# Altium PCB MB1136.PcbDoc (part 1 of 2)
Units mm, origin at the board's own origin, x right, y up, seen from the top; angles counter-clockwise.
Board outline 70 x 83 mm, 2 copper layers (Top Layer, Bottom Layer), stack 1.571 mm thick; 176 components, 154 nets, 599 pads, 425 vias.
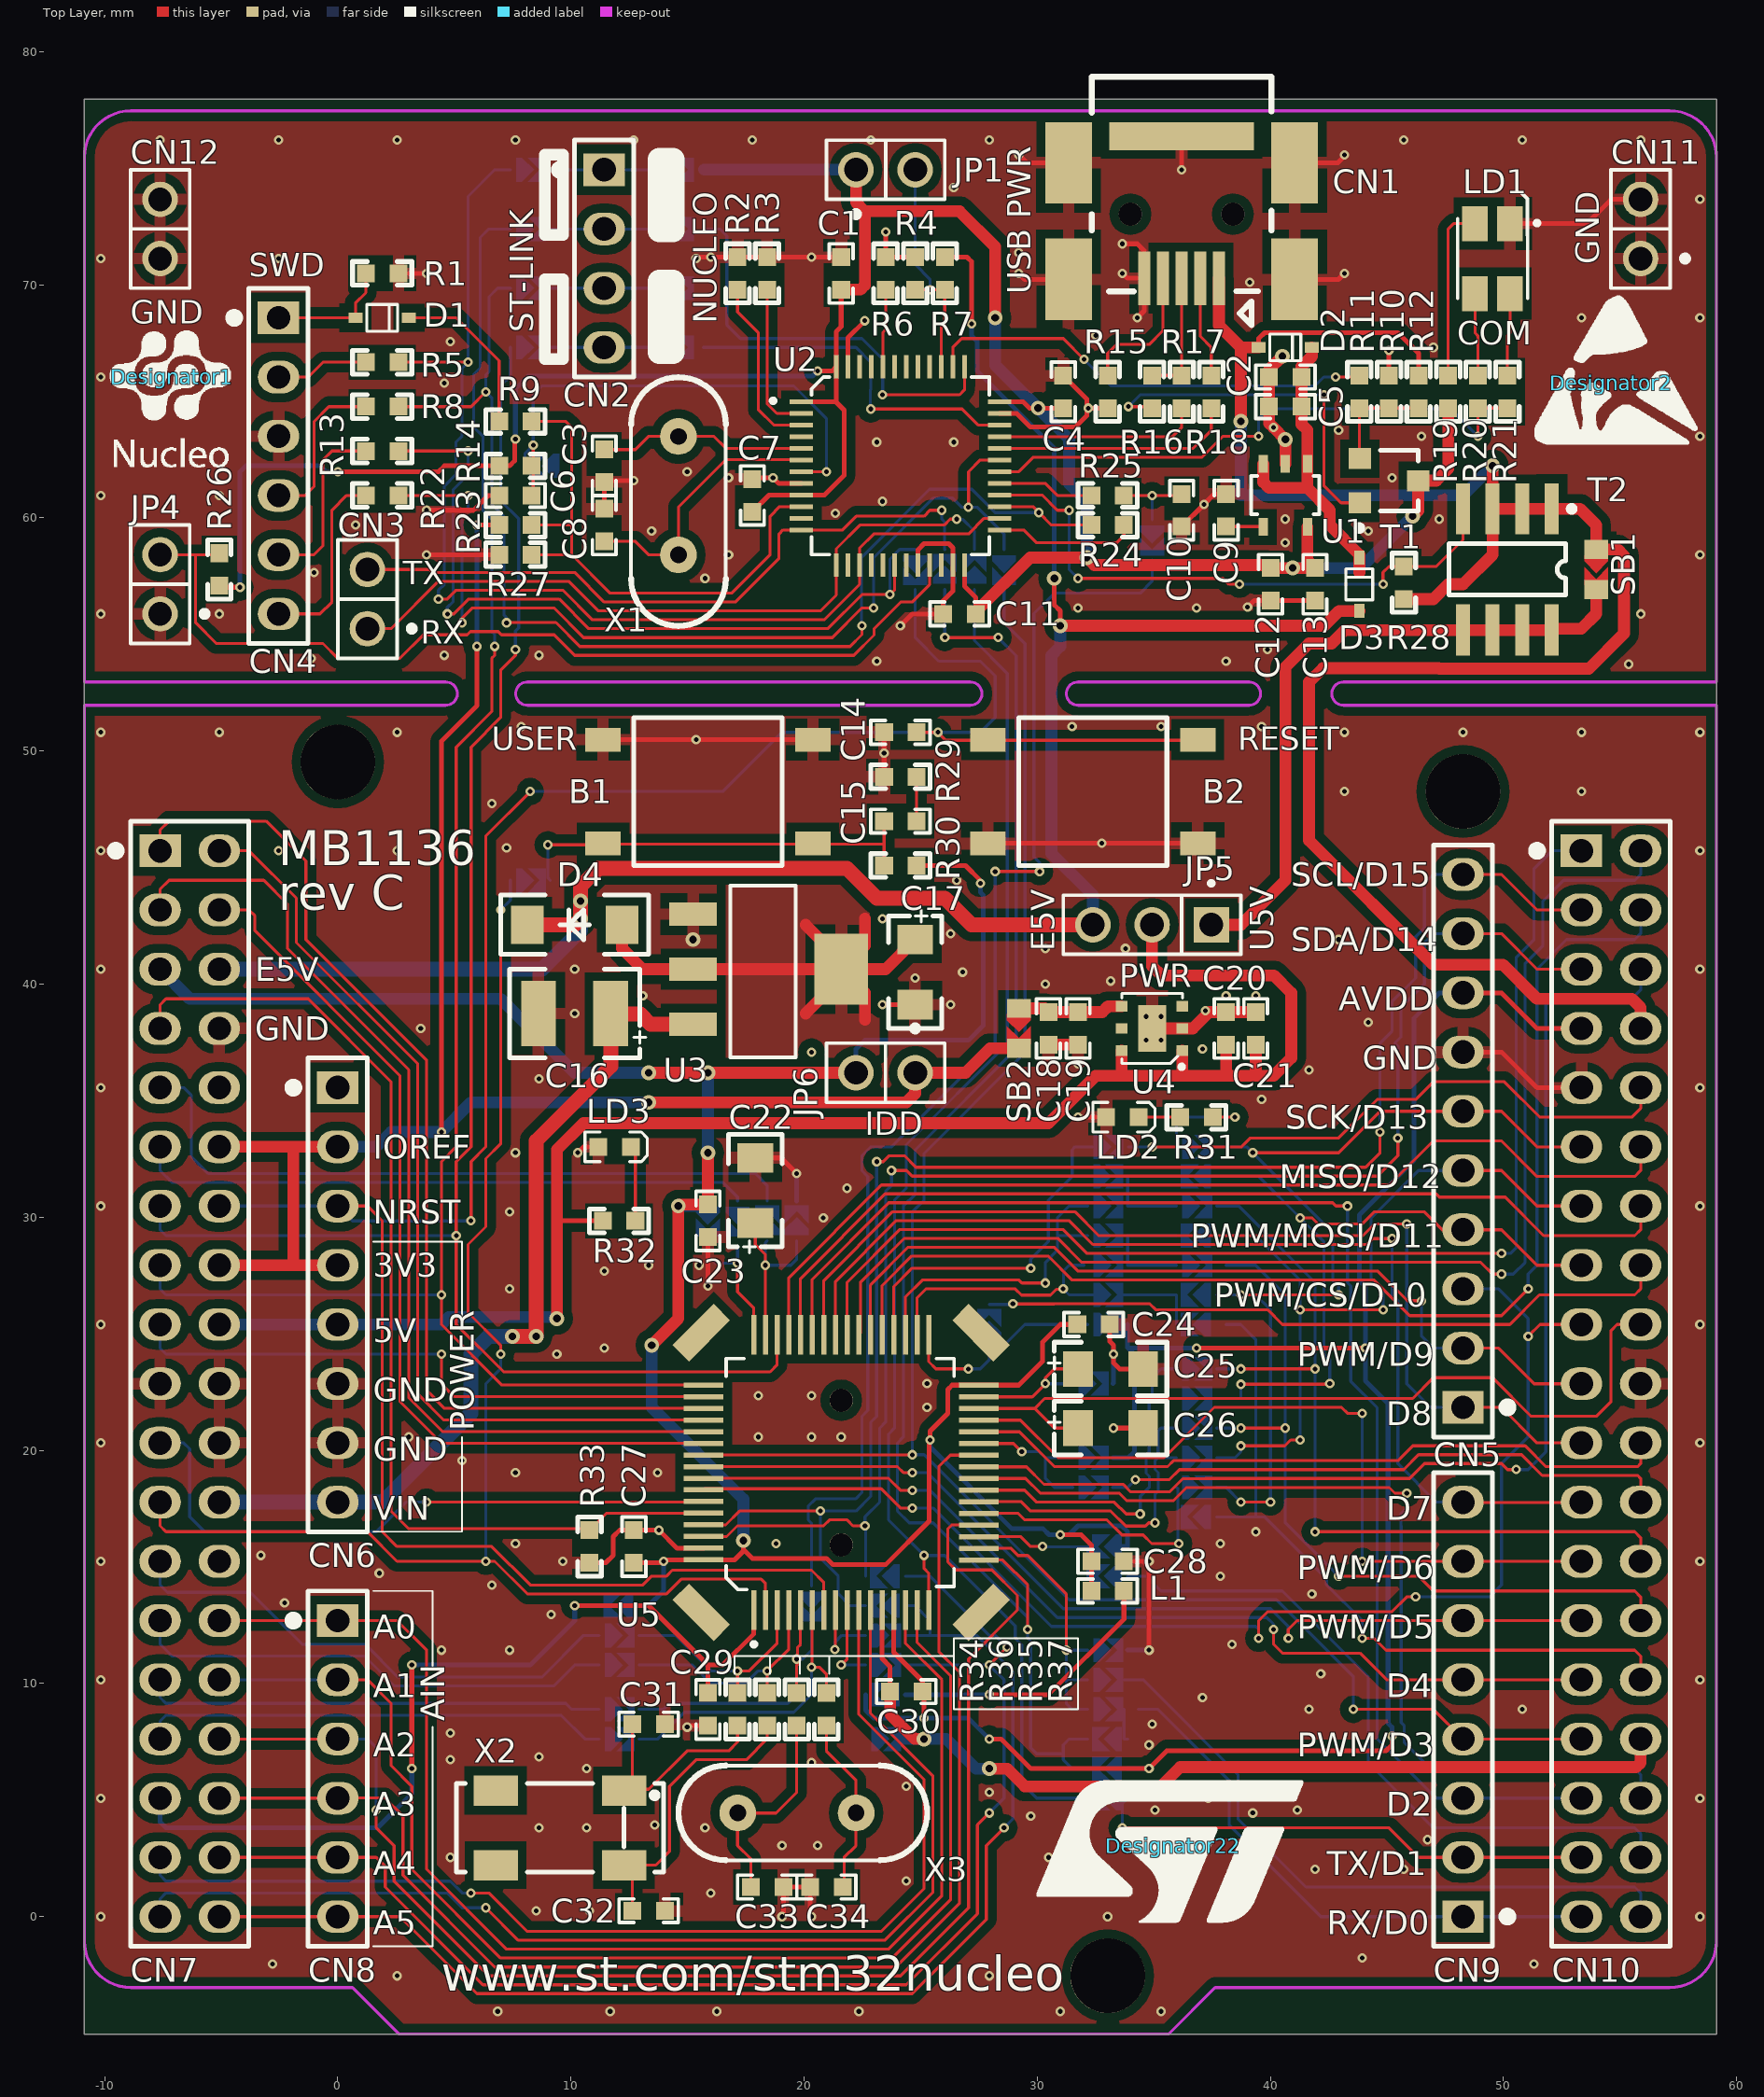
[diagram p0: Top Layer view]
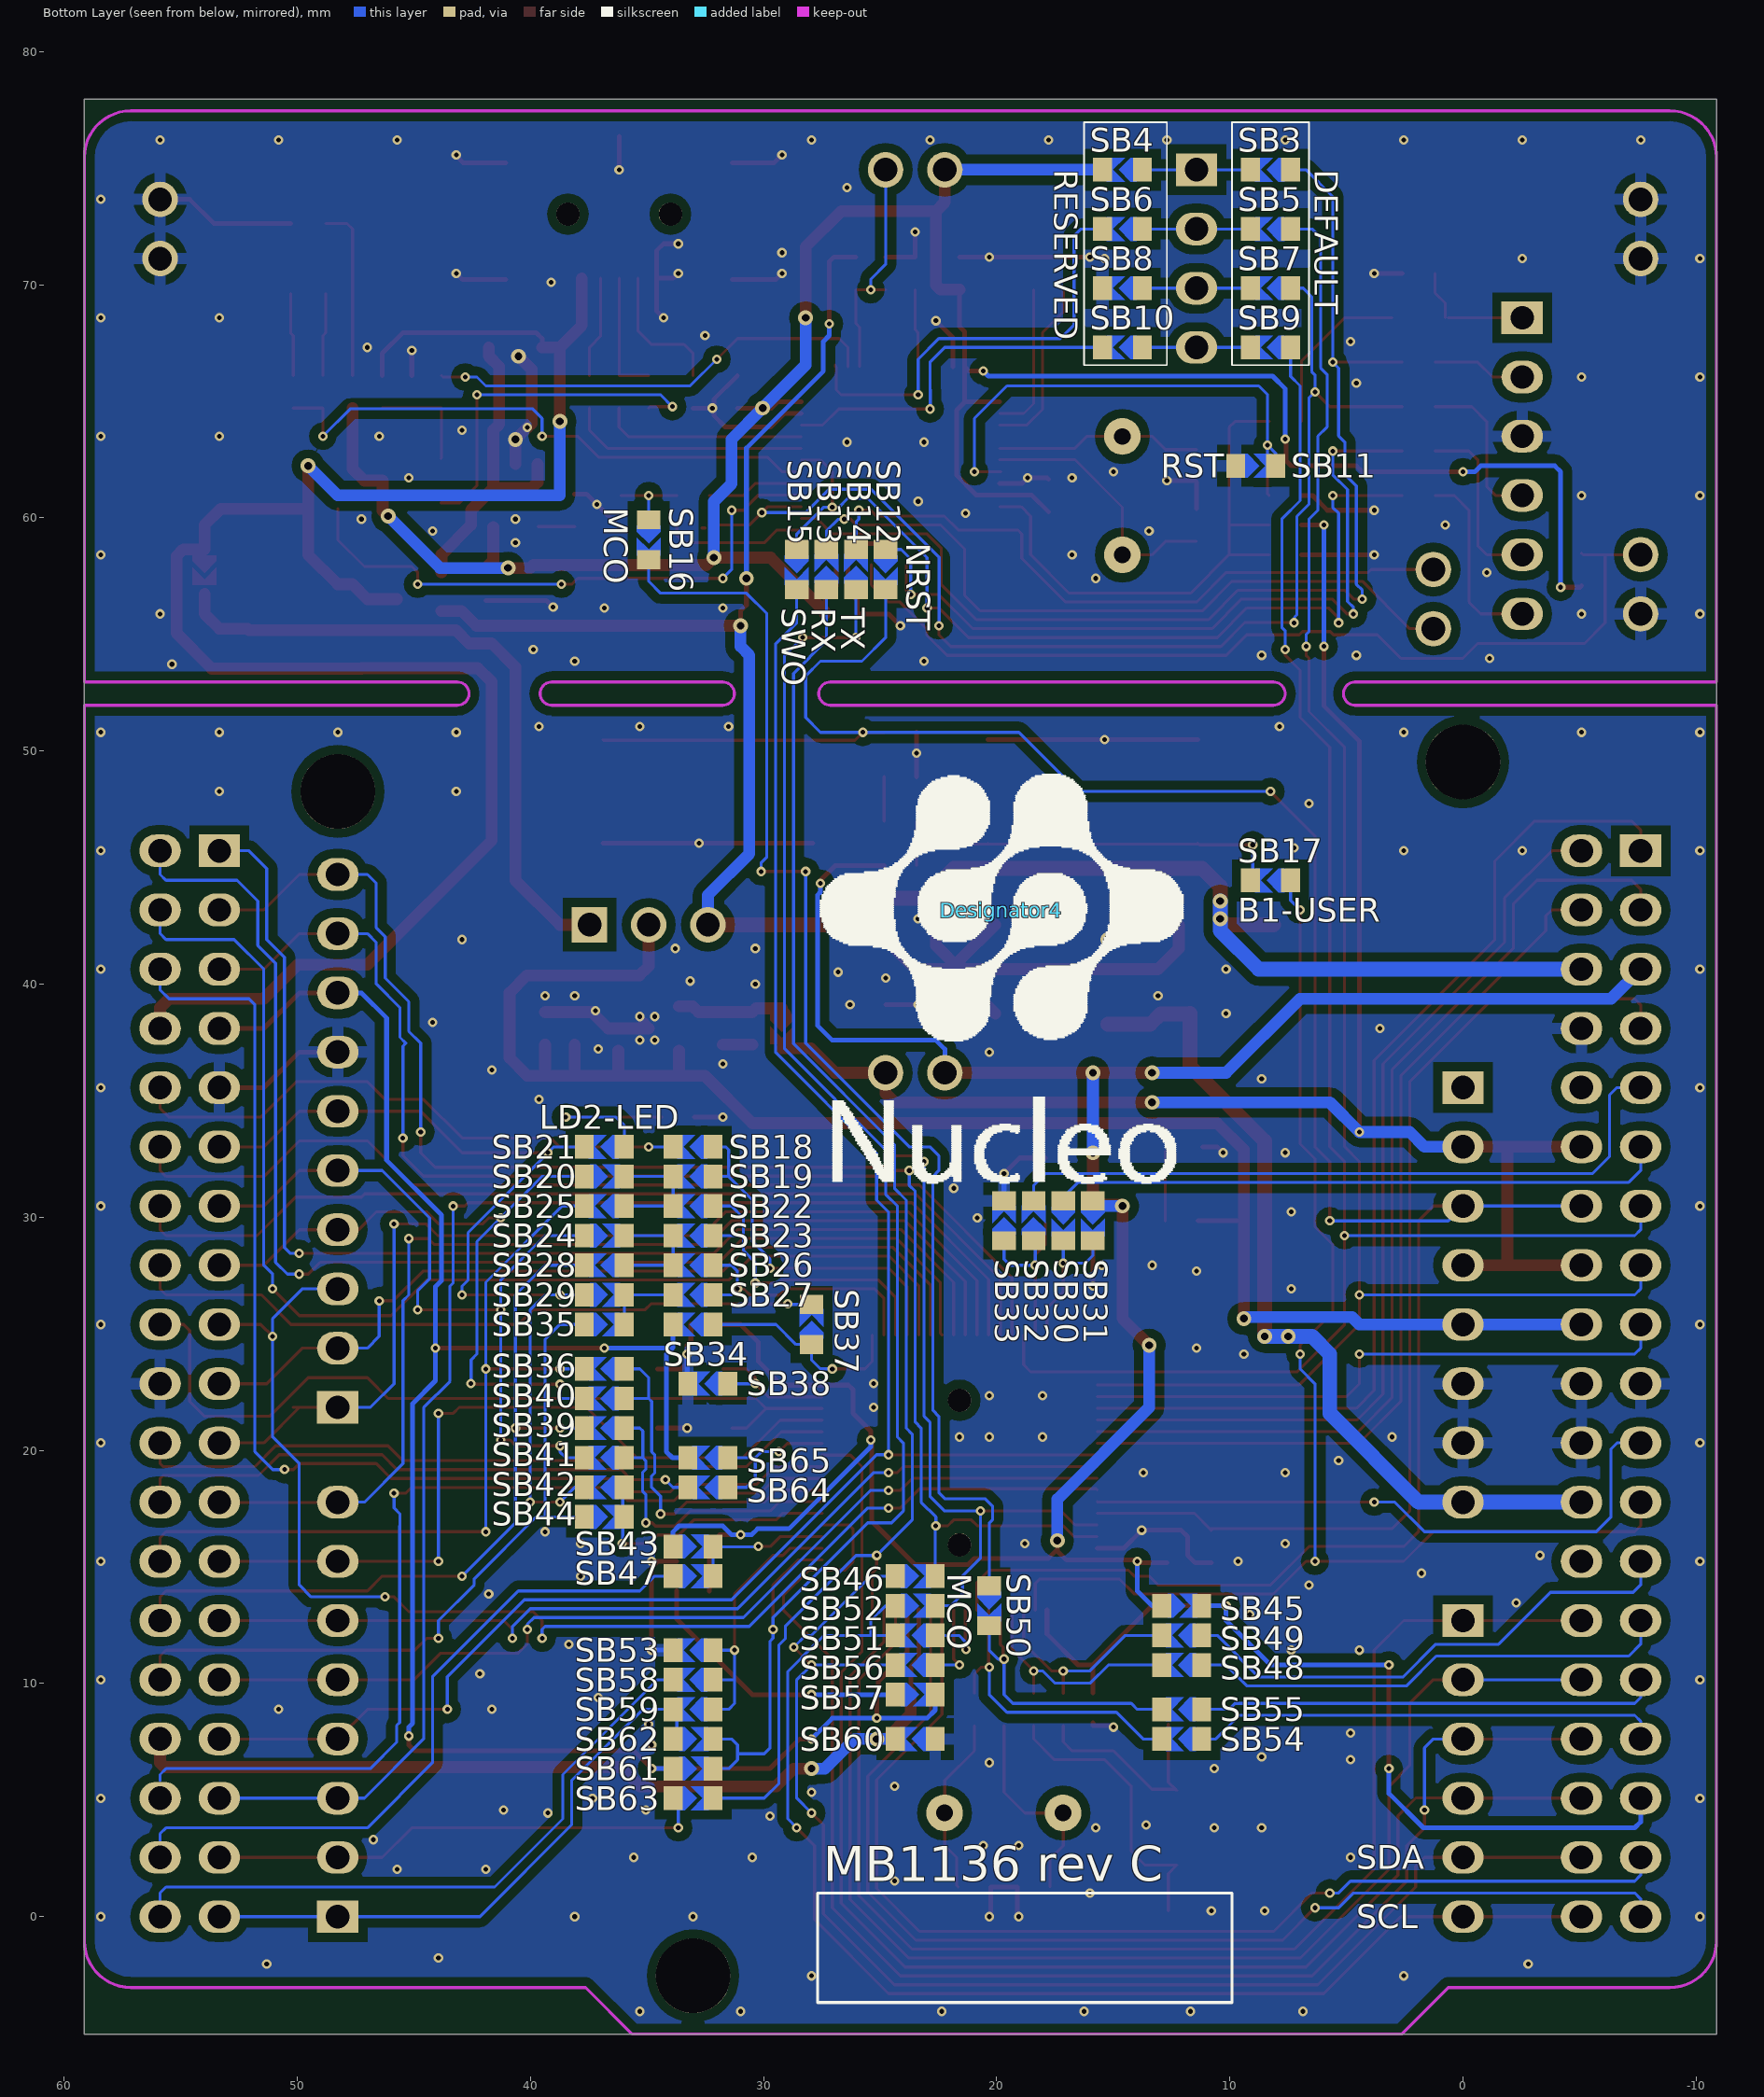
[diagram p1: Bottom Layer view, seen from below]

## Layer stack, top to bottom
Top Solder: solder mask 0.0102, Solder Resist, Dk 3.5
Top Layer: signal copper 0.0356
Dielectric1: core 1.5, FR-4, Dk 4.8
Bottom Layer: signal copper 0.0356
Bottom Solder: solder mask 0.0102, Solder Resist, Dk 3.5

## Board outline
-10.87,-5.04 -10.87,77.96 59.13,77.96 59.13,-5.04 -10.87,-5.04

## Design rules (kind name [scope] priority, off if disabled: settings)
Clearance Clearance_1 [(InPoly)] p1: gap=0.381 ignorepadtopadclearanceinfootprint=FALSE except(0: Arc-Hole Track-Hole SMDPad-Hole THPad-Hole Via-Hole Fill-Hole Poly-Hole Region-Hole Text-Hole)
Clearance Clearance_2 [(HasFootprint('SB_DIP')) or (HasFootprint('JP2_SMD')) or InNet('PC13')] p2: gap=0.127 ignorepadtopadclearanceinfootprint=FALSE except(0: Arc-Hole Track-Hole SMDPad-Hole THPad-Hole Via-Hole Fill-Hole Poly-Hole Region-Hole Text-Hole)
Clearance [All] p3: gap=0.254 ignorepadtopadclearanceinfootprint=FALSE except(0: Arc-Hole Track-Hole SMDPad-Hole THPad-Hole Via-Hole Fill-Hole Poly-Hole Region-Hole Text-Hole)
FabricationTestPointUsage TestPointUsage [All] p1: valid=0 allowmultiple=FALSE
FabricationTestpoint Testpoint [(IsPad And (OnTopLayer Or OnBottomLayer))] p1: side=3 testpointundercomponent=TRUE minsize=1.016 maxsize=2.54 preferedsize=1.524 minholesize=0 maxholesize=1.016 preferedholesize=0.813 testpointgrid=0.025 allowsidetop=TRUE allowsidebottom=TRUE usegrid=TRUE gridtolerance=0
HoleSize [All] p1: absolutevalues=TRUE maxlimit=3.81 minlimit=0.025 maxpercent=80.000 minpercent=20.000
PolygonConnect PolygonConnect_1 [IsVia] p1: connectstyle=Direct reliefconductorwidth=0.508 reliefentries=4 polygonreliefangle="90 Angle" airgapwidth=0.254
PolygonConnect [All] p2: connectstyle=Relief reliefconductorwidth=0.508 reliefentries=4 polygonreliefangle="90 Angle" airgapwidth=0.254
RoutingLayers [All] p1: top layer_v5=FALSE bottom layer_v5=FALSE
RoutingVias [All] p1: holewidth=0.33 width=0.635 viastyle="Through Hole" minholewidth=0.203 minwidth=0.406 maxholewidth=0.711 maxwidth=1.27
SilkToSolderMaskClearance SilkscreenOverComponentPads [IsPad] p1: minsilkscreentomaskgap=0.254 clearancetoexposedcopper=TRUE
SolderMaskExpansion [All] p1: expansion=0.102 istentingtop=FALSE
Width Width_1 [InNet('VDD_MCU')] p1: maxlimit=2.54 minlimit=0.152 preferedwidth=0.305
Width [All] p2: maxlimit=2.54 minlimit=0.127 preferedwidth=0.127 minimp=50.000000 maximp=50.000000 favimp=50.000000
25 further rules are at their usual default settings.

## Classes and differential pairs
component class MB1136: C16 C17 C18 C19 C20 C21 D4 JP5 JP6 LD3 R28 R32 SB1 SB2 T2 U3 U4
component class U_ST_LINK_V2-1: C1 C2 C3 C4 C5 C6 C7 C8 C9 C10 C11 C12 C13 CN1 CN2 CN3 CN4 CN11 CN12 D1 D2 D3 JP1 JP4 LD1 R1 R2 R3 R4 R5 R6 R7 R8 R9 R10 R11 R12 R13 R14 R15 R16 R17 R18 R19 R20 R21 R22 R23 R24 R25 R26 R27 SB3 SB4 SB5 SB6 SB7 SB8 SB9 SB10 SB11 SB12 SB13 SB14 SB15 SB16 T1 U1 U2 X1
net class PA[0..15]: PA0 PA1 PA2 PA3 PA4 PA5 PA6 PA7 PA8 PA9 PA10 PA11 PA12 PA13 PA14 PA15
net class PB[0..15]: PB0 PB1 PB2 PB3 PB4 PB5 PB6 PB7 PB8 PB9 PB10 PB11 PB12 PB13 PB14 PB15
net class PC[0..15]: PC0 PC1 PC2 PC3 PC4 PC5 PC6 PC7 PC8 PC9 PC10 PC11 PC12 PC13 PC14 PC15
net class PF[0..7]: PF0 PF1 PF4 PF5 PF6 PF7
component class U_MCU_64: B1 B2 C14 C15 C22 C23 C24 C25 C26 C27 C28 C29 C30 C31 C32 C33 C34 L1 R29 R30 R33 R34 R35 R36 R37 SB17 SB18 SB19 SB22 SB23 SB26 SB27 SB30 SB31 SB32 SB33 SB34 SB37 SB38 SB43 SB45 SB47 SB50 SB53 SB57 SB58 SB59 SB60 SB61 SB62 SB63 SB64 SB65 U5 X2 X3
component class U_Connectors: CN5 CN6 CN7 CN8 CN9 CN10 LD2 R31 SB20 SB21 SB24 SB25 SB28 SB29 SB35 SB36 SB39 SB40 SB41 SB42 SB44 SB46 SB48 SB49 SB51 SB52 SB54 SB55 SB56

## Components (designator, comment, footprint, x,y, rotation, side; value= is the part's Value field where it differs from the comment)
B1 "USER (Blue)" PB10 15.875,48.26 r180 top
B2 "TD-0341 [RESET/Black]" PB10 32.385,48.26 r0 top
C1 "100nF" 0603C 21.59,70.485 r90 top (schematic designator C7)
C2 "1uF_X5R_0603" 0603C 40.64,66.04 r180 top (schematic designator C9)
C3 "20pF" 0603C 11.43,62.23 r90 top (schematic designator C2)
C4 "100nF" 0603C 31.115,65.405 r90 top (schematic designator C6)
C5 "100nF" 0603C 40.64,64.77 r180 top (schematic designator C11)
C6 "100nF" 0603C 7.62,60.96 r180 top (schematic designator C4)
C7 "100nF" 0603C 17.78,60.96 r90 top (schematic designator C8)
C8 "20pF" 0603C 11.43,59.69 r270 top (schematic designator C1)
C9 "10nF_X7R_0603" 0603C 38.1,60.325 r90 top (schematic designator C12)
C10 "20pF" 0603C 36.195,60.325 r90 top (schematic designator C3)
C11 "100nF" 0603C 26.67,55.88 r180 top (schematic designator C5)
C12 "100nF" 0603C 40.005,57.15 r270 top (schematic designator C13)
C13 "1uF_X5R_0603" 0603C 41.91,57.15 r90 top (schematic designator C10)
C14 "100nF" 0603C 24.13,50.8 r180 top (schematic designator C20)
C15 "100nF" 0603C 24.13,46.99 r0 top (schematic designator C16)
C16 "10uF(25V)" TAN-B 10.16,38.735 r90 top (schematic designator C28)
C17 "10uF" TAN-A 24.765,41.91 r90 top (schematic designator C35)
C18 "1uF_X5R_0603" 0603C 30.48,38.1 r90 top (schematic designator C29)
C19 "100nF" 0603C 31.75,38.1 r270 top (schematic designator C32)
C20 "100nF" 0603C 38.1,38.1 r90 top (schematic designator C30)
C21 "1uF_X5R_0603" 0603C 39.37,38.1 r270 top (schematic designator C17)
C22 "2.2uF" TAN-A 17.907,29.75 r270 top (schematic designator C27)
C23 "100nF" 0603C 15.875,29.845 r90 top (schematic designator C24)
C24 "100nF" 0603C 32.417,25.4 r180 top (schematic designator C23)
C25 "2.2uF" TAN-A 31.75,23.495 r180 top (schematic designator C21)
C26 "2.2uF" TAN-A 31.75,20.955 r180 top (schematic designator C14)
C27 "100nF" 0603C 12.7,15.875 r270 top (schematic designator C22)
C28 "100nF" 0603C 33.02,15.24 r180 top (schematic designator C25)
C29 "1uF_X5R_0603" 0603C 15.875,8.89 r90 top (schematic designator C34)
C30 "100nF" 0603C 24.384,9.652 r0 top (schematic designator C33)
C31 "10pF[N/A]" 0603C 13.335,8.255 r180 top (schematic designator C15)
C32 "10pF[N/A]" 0603C 13.335,0.254 r180 top (schematic designator C17)
C33 "20pF[N/A]" 0603C 18.415,1.27 r180 top (schematic designator C18)
C34 "20pF[N/A]" 0603C 20.955,1.27 r0 top (schematic designator C19)
CN1 "5075BMR-05-SM" USB-MINI-B-SMD 36.195,73.025 r0 top (schematic designator CN3)
CN2 "Header 4" 1*4 11.43,74.93 r270 top
CN3 "" SIP2/2.54 1.27,55.245 r90 top (schematic designator CN4)
CN4 "Header 6X1" 1*6P -2.54,68.58 r270 top (schematic designator CN1)
CN5 "Header 10X1_Female" 1*10P_FEMALE 48.26,21.844 r90 top locked
CN6 "Header 8X1_Female" 1*8P_FEMALE 0,35.56 r270 top locked (schematic designator CN8)
CN7 "Header 19X2" 2*19P -7.62,45.72 r270 top locked (schematic designator CN9)
CN8 "Header 6X1_Female" 1*6P_FEMALE 0,12.7 r270 top locked (schematic designator CN14)
CN9 "Header 8X1_Female" 1*8P_FEMALE 48.26,0 r90 top locked (schematic designator CN11)
CN10 "Header 19X2" 2*19P 53.34,45.72 r270 top locked
CN11 "" SIP2/2.54 55.88,71.12 r90 top
CN12 "" SIP2/2.54 -7.62,71.12 r90 top
D1 "BAT60JFILM" SOD323/A 1.905,68.58 r180 top
D2 "BAT60JFILM" SOD323/A 40.64,67.31 r180 top (schematic designator D4)
D3 "BAT60JFILM" SOD323/A 43.815,57.15 r270 top
D4 "STPS2L30A" SMA 10.16,42.545 r180 top (schematic designator D5)
Designator1 "Comment" "NUCLEO_black 0.5cm" -7.112,66.04 r0 top
Designator2 "Comment" "LOGO ESD" 54.61,65.786 r0 top
Designator4 "Comment" "NUCLEO_black 2cm" 19.812,43.18 r180 bottom
Designator22 "Comment" ST_LOGO_10mm 35.814,3.048 r0 top
JP1 "" SIP2/2.54 22.225,74.93 r0 top (schematic designator JP4)
JP4 "" SIP2/2.54 -7.62,55.88 r90 top (schematic designator JP6)
JP5 "" SIP3 37.465,42.545 r180 top
JP6 "" SIP2/2.54 24.765,36.195 r180 top (schematic designator JP5)
L1 "BEAD" 0603L 33.02,13.97 r180 top
LD1 "LD_BICOLOR_CMS" HSMF-A201 49.53,71.12 r270 top
LD2 "Green" 0603D 33.655,34.29 r0 top (schematic designator LD3)
LD3 "RED" 0603D 11.874,33.02 r0 top (schematic designator LD2)
R1 "10K" 0603R 1.905,70.485 r180 top (schematic designator R5)
R2 "10K" 0603R 17.145,70.485 r90 top (schematic designator R6)
R3 "10K" 0603R 18.415,70.485 r90 top (schematic designator R4)
R4 "4K7" 0603R 24.765,70.485 r270 top (schematic designator R2)
R5 "22" 0603R 1.905,66.675 r180 top (schematic designator R8)
R6 "100K" 0603R 23.495,70.485 r90 top (schematic designator R3)
R7 "2K7" 0603R 26.035,70.485 r90 top (schematic designator R1)
R8 "22" 0603R 1.905,64.77 r180 top (schematic designator R9)
R9 "100" 0603R 7.62,64.135 r180 top (schematic designator R7)
R10 "36K" 0603R 45.085,65.405 r90 top (schematic designator R36)
R11 "100" 0603R 43.815,65.405 r270 top (schematic designator R35)
R12 "10K" 0603R 46.355,65.405 r270 top (schematic designator R34)
R13 "22" 0603R 1.905,62.865 r180 top (schematic designator R10)
R14 "100K" 0603R 7.62,62.23 r0 top (schematic designator R12)
R15 "100K" 0603R 33.02,65.405 r90 top (schematic designator R26)
R16 "1K5" 0603R 34.925,65.405 r90 top (schematic designator R23)
R17 "0" 0603R 36.195,65.405 r90 top (schematic designator R25)
R18 "0" 0603R 37.465,65.405 r90 top (schematic designator R24)
R19 "0" 0603R 47.625,65.405 r90 top
R20 "100" 0603R 48.895,65.405 r270 top (schematic designator R18)
R21 "100" 0603R 50.165,65.405 r270 top (schematic designator R17)
R22 "22" 0603R 1.905,60.96 r180 top (schematic designator R11)
R23 "4K7" 0603R 7.62,59.69 r180 top (schematic designator R14)
R24 "100" 0603R 33.02,59.69 r0 top (schematic designator R16)
R25 "100" 0603R 33.02,60.96 r180 top (schematic designator R13)
R26 "10K" 0603R -5.08,57.785 r270 top (schematic designator R37)
R27 "4K7" 0603R 7.62,58.42 r180 top (schematic designator R15)
R28 "4K7" 0603R 45.72,57.213 r270 top (schematic designator R34)
R29 "100" 0603R 24.13,48.895 r180 top (schematic designator R30)
R30 "4K7" 0603R 24.13,45.085 r180 top (schematic designator R28)
R31 "510" 0603R 36.83,34.29 r0 top (schematic designator R27)
R32 "1K" 0603R 12.065,29.845 r0 top (schematic designator R21)
R33 "10K" 0603R 10.795,15.875 r90 top
R34 "[N/A]" 0603R 17.145,8.89 r270 top (schematic designator R29)
R35 "[N/A]" 0603R 19.685,8.89 r90 top (schematic designator R37)
R36 "[N/A]" 0603R 18.415,8.89 r270 top (schematic designator R31)
R37 "[N/A]" 0603R 20.955,8.89 r90 top (schematic designator R32)
SB1 "Circuit Breaker" JP2_SMD 53.975,57.785 r90 top (schematic designator SB45)
SB2 "Circuit Breaker" JP2_SMD 29.21,38.1 r90 top (schematic designator SB46)
SB3 "Circuit Breaker" JP2_SMD 8.255,74.93 r180 bottom
SB4 "Circuit Breaker" JP2_SMD 14.605,74.93 r180 bottom
SB5 "Circuit Breaker" JP2_SMD 8.255,72.39 r180 bottom
SB6 "Circuit Breaker" JP2_SMD 14.605,72.39 r180 bottom
SB7 "Circuit Breaker" JP2_SMD 8.255,69.85 r180 bottom
SB8 "Circuit Breaker" JP2_SMD 14.605,69.85 r180 bottom
SB9 "Circuit Breaker" JP2_SMD 8.255,67.31 r180 bottom
SB10 "Circuit Breaker" JP2_SMD 14.605,67.31 r180 bottom
SB11 "Circuit Breaker" JP2_SMD 8.89,62.23 r0 bottom
SB12 "Circuit Breaker" JP2_SMD 24.765,57.785 r90 bottom (schematic designator SB1)
SB13 "Circuit Breaker" JP2_SMD 27.305,57.785 r270 bottom
SB14 "Circuit Breaker" JP2_SMD 26.035,57.785 r270 bottom (schematic designator SB12)
SB15 "Circuit Breaker" JP2_SMD 28.575,57.785 r90 bottom (schematic designator SB2)
SB16 "Circuit Breaker" JP2_SMD 34.925,59.055 r90 bottom (schematic designator SB51)
SB17 "Circuit Breaker" JP2_SMD 8.255,44.45 r180 bottom (schematic designator SB19)
SB18 "Circuit Breaker" JP2_SMD 33.02,33.02 r180 bottom (schematic designator SB26)
SB19 "Circuit Breaker" JP2_SMD 33.02,31.75 r180 bottom (schematic designator SB25)
SB20 "Circuit Breaker" JP2_SMD 36.83,31.75 r0 bottom (schematic designator SB61)
SB21 "Circuit Breaker" JP2_SMD 36.83,33.02 r180 bottom (schematic designator SB41)
SB22 "Circuit Breaker" JP2_SMD 33.02,30.48 r180 bottom (schematic designator SB24)
SB23 "Circuit Breaker" JP2_SMD 33.02,29.21 r180 bottom
SB24 "Circuit Breaker" JP2_SMD 36.83,29.21 r0 bottom (schematic designator SB58)
SB25 "Circuit Breaker" JP2_SMD 36.83,30.48 r180 bottom (schematic designator SB52)
SB26 "Circuit Breaker" JP2_SMD 33.02,27.94 r180 bottom (schematic designator SB22)
SB27 "Circuit Breaker" JP2_SMD 33.02,26.67 r180 bottom (schematic designator SB18)
SB28 "Circuit Breaker" JP2_SMD 36.83,27.94 r180 bottom (schematic designator SB62)
SB29 "Circuit Breaker" JP2_SMD 36.83,26.67 r0 bottom (schematic designator SB54)
SB30 "Circuit Breaker" JP2_SMD 17.145,29.845 r90 bottom
SB31 "Circuit Breaker" JP2_SMD 15.875,29.845 r90 bottom (schematic designator SB28)
SB32 "Circuit Breaker" JP2_SMD 18.415,29.845 r270 bottom (schematic designator SB33)
SB33 "Circuit Breaker" JP2_SMD 19.685,29.845 r270 bottom (schematic designator SB31)
SB34 "Circuit Breaker" JP2_SMD 33.02,25.4 r180 bottom (schematic designator SB17)
SB35 "Circuit Breaker" JP2_SMD 36.83,25.4 r0 bottom (schematic designator SB56)
SB36 "Circuit Breaker" JP2_SMD 36.83,23.495 r180 bottom (schematic designator SB55)
SB37 "Circuit Breaker" JP2_SMD 27.94,25.4 r270 bottom (schematic designator SB44)
SB38 "Circuit Breaker" JP2_SMD 32.385,22.86 r180 bottom (schematic designator SB27)
SB39 "Circuit Breaker" JP2_SMD 36.83,20.955 r180 bottom (schematic designator SB63)
SB40 "Circuit Breaker" JP2_SMD 36.83,22.225 r180 bottom (schematic designator SB60)
SB41 "Circuit Breaker" JP2_SMD 36.83,19.685 r180 bottom (schematic designator SB57)
SB42 "Circuit Breaker" JP2_SMD 36.83,18.415 r180 bottom (schematic designator SB53)
SB43 "Circuit Breaker" JP2_SMD 33.02,15.875 r0 bottom (schematic designator SB29)
SB44 "Circuit Breaker" JP2_SMD 36.83,17.145 r0 bottom (schematic designator SB59)
SB45 "Circuit Breaker" JP2_SMD 12.065,13.335 r0 bottom (schematic designator SB21)
SB46 "Circuit Breaker" JP2_SMD 23.495,14.605 r0 bottom (schematic designator SB50)
SB47 "Circuit Breaker" JP2_SMD 33.02,14.605 r0 bottom (schematic designator SB32)
SB48 "Circuit Breaker" JP2_SMD 12.065,10.795 r180 bottom (schematic designator SB38)
SB49 "Circuit Breaker" JP2_SMD 12.065,12.065 r180 bottom (schematic designator SB37)
SB50 "Circuit Breaker" JP2_SMD 20.32,13.335 r90 bottom (schematic designator SB20)
SB51 "Circuit Breaker" JP2_SMD 23.495,12.065 r180 bottom (schematic designator SB49)
SB52 "Circuit Breaker" JP2_SMD 23.495,13.335 r0 bottom (schematic designator SB48)
SB53 "Circuit Breaker" JP2_SMD 33.02,11.43 r180 bottom (schematic designator SB36)
SB54 "Circuit Breaker" JP2_SMD 12.065,7.62 r180 bottom (schematic designator SB40)
SB55 "Circuit Breaker" JP2_SMD 12.065,8.89 r180 bottom (schematic designator SB39)
SB56 "Circuit Breaker" JP2_SMD 23.495,10.795 r180 bottom (schematic designator SB47)
SB57 "Circuit Breaker" JP2_SMD 23.495,9.525 r0 bottom (schematic designator SB42)
SB58 "Circuit Breaker" JP2_SMD 33.02,10.16 r180 bottom (schematic designator SB35)
SB59 "Circuit Breaker" JP2_SMD 33.02,8.89 r180 bottom (schematic designator SB34)
SB60 "Circuit Breaker" JP2_SMD 23.495,7.62 r180 bottom (schematic designator SB43)
SB61 "Circuit Breaker" JP2_SMD 33.02,6.35 r0 bottom (schematic designator SB16)
SB62 "Circuit Breaker" JP2_SMD 33.02,7.62 r0 bottom (schematic designator SB15)
SB63 "Circuit Breaker" JP2_SMD 33.02,5.08 r0 bottom (schematic designator SB14)
SB64 "Circuit Breaker" JP2_SMD 32.385,18.415 r180 bottom
SB65 "Circuit Breaker" JP2_SMD 32.385,19.685 r180 bottom
T1 "9013" SOT-23 45.085,61.595 r270 top (schematic designator T2)
T2 "STS7PF30L" SO8 50.165,57.785 r180 top
U1 "LD3985M33R" SOT-23-5L 40.64,60.96 r270 top (schematic designator U2)
U2 "STM32F103CBT6" "QFP48 7X7" 24.13,62.23 r270 top (schematic designator U1)
U3 "LD1117S50TR" SOT-223 18.415,40.64 r180 top (schematic designator U13)
U4 "LD39050PU33R" DFN6(3X3) 34.925,38.1 r90 top
U5 "MCU_LQFP64" LQFP64 21.59,19.05 r0 top locked (schematic designator U3)
X1 "8MHz(12pF)" XTAL1 14.605,58.42 r90 top
X2 "32.768K[N/A]" XTAL_4SM_8X3R8 9.525,3.81 r180 top
X3 "8MHz(16pF)[N/A]" XTAL1 22.225,4.445 r180 top

## Footprints (in the part's own frame and the unit in brackets; to place one, negate y for a bottom-side part, rotate by r counter-clockwise, add the part's x,y. Pads: shape width x height; smd on the part's side, far side on the other; paste and mask are expansions set on the pad)
1*4 [mil]
  rect 55x70 hole 40: 1(0,0)
  oval 55x70 hole 40: 2(100,0) 3(200,0) 4(300,0)
  silkscreen extent -50,-82 350,50
1*6P [mil]
  rect 55x70 hole 40: 1(0,0)
  oval 55x70 hole 40: 2(100,0) 3(200,0) 4(300,0) 5(400,0) 6(500,0)
  silkscreen extent -50,-82 550,50
1*6P_FEMALE [mil]
  rect 55x70 hole 40: 1(0,0)
  oval 55x70 hole 40: 2(100,0) 3(200,0) 4(300,0) 5(400,0) 6(500,0)
  silkscreen extent -50,-82 550,50
1*8P_FEMALE [mil]
  rect 55x70 hole 40: 1(0,0)
  oval 55x70 hole 40: 2(100,0) 3(200,0) 4(300,0) 5(400,0) 6(500,0) 7(600,0) 8(700,0)
  silkscreen extent -50,-82 750,50
1*10P_FEMALE [mil]
  rect 55x70 hole 40: 1(0,0)
  oval 55x70 hole 40: 2(100,0) 3(200,0) 4(300,0) 5(400,0) 6(500,0) 7(600,0) 8(700,0) 9(800,0) 10(900,0)
  silkscreen extent -50,-82 950,50
2*19P [mil]
  rect 55x70 hole 40: 1(0,0)
  oval 55x70 hole 40: 2(0,100) 3(100,0) 4(100,100) 5(200,0) 6(200,100) 7(300,0) 8(300,100) 9(400,0) 10(400,100) 11(500,0) 12(500,100) 13(600,0) 14(600,100) 15(700,0) 16(700,100) 17(800,0) 18(800,100) 19(900,0) 20(900,100) 21(1000,0) 22(1000,100) 23(1100,0) 24(1100,100) 25(1200,0) 26(1200,100) 27(1300,0) 28(1300,100) 29(1400,0) 30(1400,100) 31(1500,0) 32(1500,100) 33(1600,0) 34(1600,100) 35(1700,0) 36(1700,100) 37(1800,0) 38(1800,100)
  silkscreen extent -50,-82 1850,150
0603C [mil]
  rect 30x30 smd: 1(27.5,0) 2(-27.5,0)
  silkscreen extent -50,-20 50,20
0603D [mil]
  rect 30x30 smd: 1(27.5,0) 2(-27.5,0)
  silkscreen extent -50,-25 55,25
0603L [mil]
  rect 30x30 smd: 1(27.5,0) 2(-27.5,0)
  silkscreen extent -50,-20 50,20
0603R [mil]
  rect 30x30 smd: 1(27.5,0) 2(-27.5,0)
  silkscreen extent -50,-20 50,20
DFN6(3X3) [mm]
  rect 2x1.2 smd: 0(0,0)
  rect 0.45x0.5 smd: 1(-0.95,-1.3) 2(0,-1.3) 3(0.95,-1.3) 4(0.95,1.3) 5(0,1.3) 6(-0.95,1.3)
  silkscreen extent -1.71,-1.33 1.5,1.3
HSMF-A201 [mm]
  rect 1.5x1.1 smd: 1(-1.5,0.75) 2(1.5,0.75) 3(1.5,-0.75) 4(-1.5,-0.75)
  silkscreen extent -2.79,-1.5 1.7,1.96
JP2_SMD [mil]
  rect 32x40 smd: 1(33.75,0) 2(-33.75,0)
  Top Layer region: -26.25,0 -16.25,0 3.75,-20 -26.25,-20
  Top Layer region: -26.25,0 -16.25,0 3.75,20 -26.25,20
  Top Layer region: 23.75,20 13.75,20 -6.25,0 13.75,-20 23.75,-20
"LOGO ESD" [mm]
  silkscreen extent -3.23,-2.59 3.66,3.68
LQFP64 [mm]
  rect 1x2.5 smd rot 45: 0(-6,-6) 0(6,6)
  rect 1x2.5 smd rot 135: 0(-6,6) 0(6,-6)
  round 1 hole 1 unplated: 0(0,-3.1) 0(0,3.1)
  rect 0.22x1.7 smd: 1(-3.747,-5.901) 2(-3.247,-5.901) 3(-2.747,-5.901) 4(-2.247,-5.901) 5(-1.747,-5.901) 6(-1.247,-5.901) 7(-0.747,-5.901) 8(-0.247,-5.901) 9(0.253,-5.901) 10(0.753,-5.901) 11(1.253,-5.901) 12(1.753,-5.901) 13(2.253,-5.901) 14(2.753,-5.901) 15(3.253,-5.901) 16(3.753,-5.901) 33(3.753,5.902) 34(3.253,5.902) 35(2.753,5.902) 36(2.253,5.902) 37(1.753,5.902) 38(1.253,5.902) 39(0.753,5.902) 40(0.253,5.902) 41(-0.247,5.902) 42(-0.747,5.902) 43(-1.247,5.902) 44(-1.747,5.902) 45(-2.247,5.902) 46(-2.747,5.902) 47(-3.247,5.902) 48(-3.746,5.901)
  rect 1.7x0.22 smd: 17(5.901,-3.753) 18(5.901,-3.253) 19(5.901,-2.753) 20(5.901,-2.253) 21(5.901,-1.753) 22(5.901,-1.253) 23(5.901,-0.753) 24(5.901,-0.253) 25(5.901,0.247) 26(5.901,0.747) 27(5.901,1.247) 28(5.901,1.747) 29(5.901,2.247) 30(5.901,2.747) 31(5.901,3.247) 32(5.901,3.747) 49(-5.902,3.753) 50(-5.902,3.253) 51(-5.902,2.753) 52(-5.902,2.253) 53(-5.902,1.753) 54(-5.902,1.253) 55(-5.902,0.753) 56(-5.902,0.253) 57(-5.902,-0.247) 58(-5.902,-0.747) 59(-5.902,-1.247) 60(-5.902,-1.747) 61(-5.902,-2.247) 62(-5.902,-2.746) 63(-5.902,-3.246) 64(-5.902,-3.746)
  silkscreen extent -4.94,-7.42 4.84,4.89
"NUCLEO_black 0.5cm" [mm]
  silkscreen extent -2.67,-3.86 2.51,1.98
"NUCLEO_black 2cm" [mm]
  silkscreen extent -7.75,-11.71 7.8,5.82
PB10 [mil]
  rect 60x40 smd: 1(-177.17,-87.5) 2(-177.17,87.5) 3(177.17,87.5) 4(177.17,-87.5)
  silkscreen extent -125,-125 125,125
"QFP48 7X7" [mm]
  rect 0.2x1 smd: 1(-2.75,-4.25) 2(-2.25,-4.25) 3(-1.75,-4.25) 4(-1.25,-4.25) 5(-0.75,-4.25) 6(-0.25,-4.25) 7(0.25,-4.25) 8(0.75,-4.25) 9(1.25,-4.25) 10(1.75,-4.25) 11(2.25,-4.25) 12(2.75,-4.25) 25(2.75,4.25) 26(2.25,4.25) 27(1.75,4.25) 28(1.25,4.25) 29(0.75,4.25) 30(0.25,4.25) 31(-0.25,4.25) 32(-0.75,4.25) 33(-1.25,4.25) 34(-1.75,4.25) 35(-2.25,4.25) 36(-2.75,4.25)
  rect 1x0.2 smd: 13(4.25,-2.75) 14(4.25,-2.25) 15(4.25,-1.75) 16(4.25,-1.25) 17(4.25,-0.75) 18(4.25,-0.25) 19(4.25,0.25) 20(4.25,0.75) 21(4.25,1.25) 22(4.25,1.75) 23(4.25,2.25) 24(4.25,2.75) 37(-4.25,2.75) 38(-4.25,2.25) 39(-4.25,1.75) 40(-4.25,1.25) 41(-4.25,0.75) 42(-4.25,0.25) 43(-4.25,-0.25) 44(-4.25,-0.75) 45(-4.25,-1.25) 46(-4.25,-1.75) 47(-4.25,-2.25) 48(-4.25,-2.75)
  silkscreen extent -3.81,-5.52 3.81,3.81
SIP2/2.54 [mil]
  round 60 hole 40: 1(0,0) 2(100,0)
  silkscreen extent -50,-80 150,50
SIP3 [mil]
  rect 60x60 hole 40: 1(0,0)
  round 60 hole 40: 2(100,0) 3(200,0)
  silkscreen extent -50,-72 250,50
SMA [mm]
  rect 1.4x1.64 smd: 1(-2.032,0) 2(2.032,0)
  silkscreen extent -3.17,-1.27 3.17,1.27
SO8 [mm]
  rect 0.6x2.2 smd: 1(-1.905,-2.6) 2(-0.635,-2.6) 3(0.635,-2.6) 4(1.905,-2.6) 5(1.905,2.6) 6(0.635,2.6) 7(-0.635,2.6) 8(-1.905,2.6)
  silkscreen extent -2.88,-2.72 2.5,1.1
SOD323/A [mm]
  rect 0.6x0.45 smd: 1(1.143,0) 2(-1.143,0)
  silkscreen extent -0.67,-0.57 0.67,0.57
SOT-23 [mm]
  rect 0.9x0.95 smd: 1(0.95,-1.25) 2(-0.95,-1.25) 3(0,1.25)
  silkscreen extent -1.3,-1.39 2.16,1.25
SOT-23-5L [mil]
  rect 30x16 smd: 1(-53.15,37.4) 2(-53.15,0) 3(-53.15,-37.4) 4(53.15,-37.4) 5(53.15,37.4)
  silkscreen extent -33,-58 32,57
SOT-223 [mil]
  rect 80x40 smd: 1(125,-93) 2(125,0) 3(125,93)
  rect 90x120 smd: 4(-125,0)
  silkscreen extent -48,-141 62,149
ST_LOGO_10mm [mm]
  silkscreen extent -5.84,-3.29 5.59,2.79
TAN-A [mil]
  rect 50x60 smd: 1(0,0) 2(-110,0)
  silkscreen extent -150,-45 50,45
TAN-B [mm]
  rect 2.8x1.5 smd: 1(0,-1.55) 2(0,1.55)
  silkscreen extent -1.91,-3.05 1.91,2.79
USB-MINI-B-SMD [mm]
  round 1 hole 1 unplated: 0(-2.2,0) 0(2.194,0)
  rect 0.508x2.3 smd: 1(1.597,-2.75) 2(0.797,-2.75) 3(-0.003,-2.75) 4(-0.803,-2.75) 5(-1.603,-2.75)
  rect 2x3.5 smd: 6(-4.853,-2.8) 6(-4.853,2.2) 6(4.847,-2.8) 6(4.847,2.2)
  rect 6.2x1.2 smd: 6(0,3.35)
  silkscreen extent -3.85,-4.76 3.85,5.9
XTAL1 [mil]
  round 62 hole 28: 1(-0.36,-0.2) 2(199.64,-0.2)
  silkscreen extent -120,-80 300,80
XTAL_4SM_8X3R8 [mm]
  rect 1.9x1.3 smd: 1(-2.75,-1.6) 2(2.75,-1.6) 3(2.75,1.6) 4(-2.75,1.6)
  silkscreen extent -4.44,-1.91 4.44,1.91

## Part data
B1 B2: library part "SW PUSHBUTTON", "SE PUSHBUTTON"
C1 C3 C4 C5 C6 C7 C8 C10 C11 C12 C19 C20: library part Capacitor_ST, "Capacitor 0402 / 0603 / 0805"
C2 C13 C18 C21 C29: library part "CAP SMD 0603  X5R 1µF 25V 10%", "0603  X5R 1?"
C9: library part "CAP SMD 0603  X7R 10000PF 50V 10%", "0603  X7R 10NF"
C14 C15 C31 C32 C33 C34: library part CAP, "Capacitor"
C16 C17: library part "Cap Pol1", "Polarized Capacitor (Radial)"
C22 C25 C26: library part Cap_2.2uF_X7R_10%_0805, "Capacitor,2.2uF,16V, X7R,10%,0805,YAGEO"
C23 C24 C27 C28 C30: library part Cap, "Capacitor"
CN1: library part "USB-MINI-typeB connector", "USB-MINI-typeB connector"
CN2: "Header, 4-Pin, Single row"
CN3 CN11 CN12 JP1 JP4 JP6: library part JP2
CN4: "Header, 6-Pin, Single row"
CN5: "Header, 10-Pin, Single row,female"
CN6 CN9: "Header, 8-Pin, Single row,female"
CN7 CN10: "Header, 19-Pin, Dual row"
CN8: "Header, 6-Pin, Single row,female"
JP5: library part Jumper3
L1: library part Inductor, "Inductor"
LD1: "Bicolor Led"
LD2: library part LED2, "Typical RED, GREEN, YELLOW, AMBER GaAs LED"
LD3: library part PHOTO
R1 R2 R3 R5 R6 R8 R9 R11 R13 R14 R15 R16 R17 R18 R19 R20 R21 R22 R23 R24 R25 R27 R32: library part Resistor_ST, "Resistor 0402 / 0603 / 0805"
R4 R7 R10 R12 R26 R28 R29 R31 R34 R35 R36 R37: library part Res1, "Resistor"
R30 R33: library part res1, "Resistor"
T1: library part NPN, "NPN Bipolar Transistor"
U1: "Ultra low drop-low noise BiCMOS voltage, regulators low ESR capacitors compatible"
U2: "Medium-density performance line ARM-based 32-bit MCU with 64KB Flash"
U3: library part LD1117
U4: library part LD39050P
X1: library part XTAL, "Crystal Oscillator"
X2: library part MC306
X3: library part CRYSTAL, "Crystal"

## Free pads (board coordinates)
  round 3.2 hole 3.2 unplated: 0(0,49.53) 0(33.02,-2.54) 0(48.26,48.26)

## Via types
v1: diameter 0.406, hole 0.203, Top Layer to Bottom Layer, tented both sides, 399 vias
v2: diameter 0.635, hole 0.33, Top Layer to Bottom Layer, tented both sides, 26 vias

## Nets (pads, with @x,y where several pads share a name; then routed paths per layer and width w, separated by ;. In a path a pad name is that pad's centre, name@x,y a point inside that pad or via, vN(x,y) a via of type N, cw(c..) or ccw(c..) an arc to the next point about the centre after c; other vN are vias at no path point)
+3V3: CN6.2 CN6.4 CN7.12 CN7.16 JP6.1 R23.1 SB2.2 | length 74.3
  Top Layer w0.203: v1(4.445,33.655) 4.445,50.419 5.969,51.943 v1(5.969,54.483) ; v1(5.969,59.69) R23.1@6.921,59.69
  Top Layer w0.508: CN7.16@-5.08,27.94 -1.905,27.94 ; CN7.12@-5.08,33.02 -1.905,33.02 ; CN6.4@0,27.94 -1.905,27.94 ; CN6.2@0,33.02 -1.905,33.02 ; v2(13.335,34.925) 24.384,34.925 24.765,35.306 JP6.1@24.765,36.195 26.924,36.195 27.972,37.243 SB2.2@29.21,37.243 ; -1.905,27.94 -1.905,33.02
  Bottom Layer w0.203: v1(5.969,54.483) v1(5.969,59.69)
  Bottom Layer w0.508: CN6.2@0,33.02 1.651,33.02 2.286,33.655 v1(4.445,33.655) 5.715,34.925 v2(13.335,34.925)
+3V3_ST_LINK: C1.2 C4.2 C7.2 C11.2 C12.2 C13.1 JP1.1 R14.2 R19.2 R26.1 SB4.2 T1.3 U1.5 U2.1 U2.9 U2.24 U2.36 U2.48 | length 118
  Top Layer w0.203: R26.1@-5.08,57.087 -5.016,57.023 v1(-4.191,57.023) ; v1(0,61.976) 4.318,61.976 4.572,62.23 R14.2@6.921,62.23 7.366,62.23 7.582,62.446 7.582,63.335 v1(7.62,63.373) ; C7.2@17.78,60.261 18.499,60.98 U2.9@19.88,60.98 20.873,60.98 21.717,61.824 21.717,64.622 21.38,64.959 ; U2.1@19.88,64.98 21.359,64.98 21.38,64.959 ; v1(20.574,66.294) 21.194,66.294 U2.48@21.38,66.48 ; C1.2@21.59,69.787 21.59,68.199 21.38,67.989 U2.48@21.38,66.48 ; U2.24@26.88,57.98 26.88,57.067 27.368,56.578 27.368,55.964 C11.2@27.368,55.933 ; U2.36@28.38,64.98 29.393,64.98 29.666,64.706 v2(30.035,64.706) C4.2@31.115,64.706 ; 21.38,64.959 U2.48@21.38,66.48
  Top Layer w0.508: C1.2@21.59,69.787 22.415,69.787 22.606,69.977 22.606,73.152 ; JP1.1@22.225,74.93 22.225,73.533 22.606,73.152 ; C11.2@27.368,55.88 C11.2@27.368,55.933 ; C11.2@27.368,55.964 29.697,58.293 v2(32.131,58.293) 32.449,57.975 39.878,57.975 C12.2@40.005,57.848 v2(40.958,57.848) C13.1@41.91,57.848 41.59,58.168 U1.5@41.59,59.61 ; v2(28.194,68.58) 28.194,71.628 26.67,73.152 22.606,73.152 ; v2(46.101,60.071) 46.335,60.305 T1.3@46.335,61.595 47.117,61.595 47.625,62.103 R19.2@47.625,64.706
  Bottom Layer w0.203: v1(-4.191,57.023) -4.191,61.976 -3.937,62.23 -0.762,62.23 -0.508,61.976 v1(0,61.976) ; v1(7.62,63.373) 7.62,65.532 8.166,66.078 20.358,66.078 v1(20.574,66.294)
  Bottom Layer w0.508: SB4.2@15.704,74.93 JP1.1@22.225,74.93 ; v2(28.194,68.58) 28.194,66.548 v2(30.035,64.706) 31.369,63.373 31.369,61.468 32.131,60.706 v2(32.131,58.293) ; v2(40.958,57.848) 43.879,57.848 v2(46.101,60.071)
+5V: C20.2 C21.1 CN6.5 CN7.18 JP5.2 R32.2 U4.1 U4.6 | length 72.9
  Top Layer w0.203: 9.398,29.845 R32.2@11.367,29.845
  Top Layer w0.508: v2(9.398,25.654) 9.398,30.48 9.398,32.893 10.541,34.036 30.48,34.036 32.512,36.068 33.528,36.068 ; U4.6@33.625,37.15 33.625,36.165 33.528,36.068 ; JP5.2@34.925,42.545 34.925,40.767 35.319,40.373 40.145,40.373 40.894,39.624 40.894,36.83 40.132,36.068 39.243,36.068 ; U4.1@36.225,37.15 36.225,36.098 36.195,36.068 ; C20.2@38.1,37.402 38.1,36.068 ; C21.1@39.37,37.402 39.37,36.195 39.243,36.068 ; 33.528,36.068 36.195,36.068 ; 36.195,36.068 37.338,36.068 38.1,36.068 ; 38.1,36.068 39.243,36.068
  Bottom Layer w0.508: CN7.18@-5.08,25.4 CN6.5@0,25.4 4.445,25.4 4.763,25.718 9.335,25.718 v2(9.398,25.654)
AGND: C30.2 CN10.32 SB60.2 U5.12 | length 40.3
  Top Layer w0.203: U5.12@23.343,13.149 23.343,11.074 23.685,10.731 C30.2@23.685,9.652
  Top Layer w0.508: C30.2@23.685,9.652 23.685,8.68 24.746,7.62 v2(25.146,7.62) ; v2(27.94,6.35) 28.702,6.35 29.464,5.588 35.306,5.588 36.132,6.413 55.69,6.413 55.88,6.604 CN10.32@55.88,7.62
  Bottom Layer w0.508: SB60.2@24.352,7.62 v2(25.146,7.62) 26.098,7.62 27.368,6.35 v2(27.94,6.35)
AIN_1: R9.2 R23.2 R27.2 U2.10 | length 23.7
  Top Layer w0.127: R27.2@8.319,58.42 10.033,58.42 ; R23.2@8.319,59.69 10.033,59.69 ; R9.2@8.319,64.135 9.779,64.135 10.033,63.881 10.033,59.69 ; U2.10@19.88,60.48 18.951,60.48 18.542,60.071 18.542,58.42 16.891,56.769 11.684,56.769 10.033,58.42 ; 10.033,58.42 10.033,59.69
AVDD: C30.1 CN5.8 CN10.7 SB34.2 SB57.2 SB61.1 SB65.2 U5.13 | length 88.6
  Top Layer w0.203: U5.13@23.843,13.149 23.843,11.336 25.082,10.096 C30.1@25.082,9.652 25.146,9.588 v1(25.146,8.509) ; v1(27.94,7.62) 28.448,7.62 29.718,6.35 v1(34.798,6.35) 35.56,7.112 44.958,7.112 45.212,7.366 v1(45.212,7.747) ; v1(36.83,24.384) v1(44.069,24.384) ; CN5.8@48.26,39.624 49.911,39.624 51.435,38.1 CN10.7@53.34,38.1
  Bottom Layer w0.203: SB57.2@22.638,9.525 22.638,8.858 22.987,8.509 v1(25.146,8.509) 27.051,8.509 v1(27.94,7.62) ; SB65.2@33.242,19.685 33.909,19.685 34.163,19.939 34.163,24.13 33.909,24.384 ; SB61.1@33.877,6.35 v1(34.798,6.35) ; SB34.2@33.877,25.4 33.877,24.416 33.909,24.384 ; v1(36.83,24.384) 33.909,24.384 ; v1(45.212,7.747) 45.212,8.128 45.047,8.293 45.047,22.009 44.069,22.987 v1(44.069,24.384) 44.069,27.021 43.815,27.275 43.815,30.099 46.165,32.449 46.165,38.545 47.244,39.624 CN5.8@48.26,39.624
BOOT0: CN7.7 R33.1 U5.60 | length 45
  Top Layer w0.127: CN7.7@-7.62,38.1 -7.62,39.116 -7.366,39.37 -1.27,39.37 2.286,35.814 2.286,17.399 3.048,16.637 R33.1@10.731,16.637 ; R33.1@10.795,16.574 R33.1@10.731,16.637 ; U5.60@15.688,17.303 11.525,17.303 10.858,16.637 R33.1@10.731,16.637
E5V: CN7.6 D3.1 D4.2 JP5.3 R7.1 | length 89.8
  Top Layer w0.203: R7.1@26.035,71.183 26.987,71.183 27.178,70.993 v1(27.178,68.326) ; v2(30.734,57.404) 30.734,56.261 30.988,56.007 v2(30.988,55.372)
  Top Layer w0.508: v2(30.734,57.404) v2@30.744,57.404 ; v2(30.988,55.372) 42.311,55.372 42.946,56.007 D3.1@43.815,56.007
  Top Layer w0.635: D4.2@8.128,42.545 10.16,42.545 v2(10.414,42.799) v2(10.414,43.561) 10.414,44.196 11.176,44.958 21.844,44.958 23.114,43.688 26.035,43.688 27.178,42.545 v1(32.385,42.545)
  Bottom Layer w0.203: v1(27.178,68.326) 27.178,67.818 27.432,67.564 27.432,66.294 30.734,62.992 v2(30.734,57.404)
  Bottom Layer w0.508: v2(30.988,55.372) 30.988,54.483 30.607,54.102 30.607,45.593 32.385,43.815 v1(32.385,42.545)
  Bottom Layer w0.635: CN7.6@-5.08,40.64 8.763,40.64 10.414,42.291 v2(10.414,43.561)
GND: B1.1 B1.4 B2.1 B2.4 C1.1 C2.1 C3.2 C4.1 C5.1 C6.1 C7.1 C8.2 C9.1 C10.2 C11.1 C12.1 C13.2 C14.1 C16.2 C17.2 C18.2 C19.1 C20.1 C21.2 C22.2 C23.2 C24.2 C25.2 C26.2 C27.2 C28.2 C29.2 C31.2 C32.2 C33.2 C34.2 CN1.5 CN1.6 CN4.3 CN5.7 CN6.6 CN6.7 CN7.8 CN7.19 CN7.20 CN7.22 CN10.9 CN10.20 CN11.1 CN11.2 CN12.1 CN12.2 JP4.1 LD1.1 LD2.2 LD3.2 R1.2 R2.1 R3.1 R4.2 R6.1 R10.1 R15.2 R27.1 R29.1 R33.2 SB8.2 SB11.1 SB33.2 SB38.2 SB53.2 SB60.1 U1.2 U2.8 U2.20 U2.23 U2.35 U2.47 U3.1 U4.0 U4.2 U5.63 | length 134.4
  Top Layer w0.203: R1.2@2.603,70.485 v1(3.81,70.485) ; v1(3.81,58.42) R27.1@6.921,58.42 ; v1(3.81,60.325) 5.814,60.325 6.449,60.96 C6.1@6.921,60.96 ; v1(10.287,32.766) 10.541,33.02 LD3.2@11.176,33.02 ; R33.2@10.795,15.176 11.493,15.176 11.811,15.494 11.811,16.298 12.086,16.574 C27.2@12.7,16.574 v1(13.779,16.574) 14.549,15.804 U5.63@15.688,15.804 ; B1.4@11.375,50.483 v1(15.367,50.483) B1.1@20.375,50.483 ; C8.2@11.43,60.389 C3.2@11.43,61.531 11.493,61.595 v1(12.7,61.595) ; v1(14.986,8.128) 15.05,8.191 C29.2@15.875,8.191 C29.2@15.875,8.319 ; v1@15.367,71.183 v1(16.002,71.183) R2.1@17.145,71.183 R3.1@18.415,71.183 v1(20.32,71.183) C1.1@21.59,71.183 ; v1(15.875,27.051) C23.2@15.875,29.147 ; C7.1@17.78,61.658 17.843,61.722 v1(18.669,61.722) 18.911,61.48 U2.8@19.88,61.48 ; C22.2@17.907,32.544 19.018,32.544 v1(19.685,31.877) ; v1(19.05,0) 19.113,0.064 C33.2@19.113,1.27 C34.2@20.256,1.27 20.256,0.064 v1(20.32,0) ; U2.47@21.88,66.48 21.88,67.727 v1(22.606,68.453) ; v1(23.368,39.116) C17.2@24.765,39.116 ; R29.1@23.431,48.895 v1(23.431,49.911) C14.1@23.431,50.8 ; v1(23.495,72.263) R6.1@23.495,71.183 R4.2@24.765,71.183 ; v1(24.13,55.372) 24.638,55.88 C11.1@25.971,55.88 25.971,56.451 26.38,56.86 U2.23@26.38,57.98 26.38,58.71 26.2,58.89 25.146,58.89 24.88,58.624 U2.20@24.88,57.98 ; B2.1@27.885,46.038 v1(32.766,46.038) B2.4@36.885,46.038 ; U2.35@28.38,64.48 29.119,64.48 29.7,63.899 31.641,63.899 32.131,64.389 v1@32.131,64.643 ; v1(29.21,70.485) 29.47,70.225 CN1.6@31.342,70.225 ; v1(29.21,75.565) 29.55,75.225 CN1.6@31.342,75.225 ; C4.1@31.115,66.103 32.131,65.087 v1@32.131,64.643 ; v1(31.75,34.29) LD2.2@32.957,34.29 ; R15.2@33.02,64.706 v1(32.195,64.706) v1@32.131,64.643 ; C24.2@33.115,25.4 33.115,24.67 33.274,24.511 v1(33.274,24.13) 33.274,23.749 33.528,23.495 C25.2@34.544,23.495 ; v1(33.274,20.955) C26.2@34.544,20.955 ; v1(33.655,70.485) 33.865,70.275 CN1.5@34.592,70.275 ; v1(33.655,71.755) 34.29,71.755 34.592,71.453 CN1.5@34.592,70.275 ; C28.2@33.719,15.24 34.544,15.24 34.798,14.986 v1(34.798,11.43) ; v1(34.29,68.58) 34.592,68.882 CN1.5@34.592,70.275 ; C10.2@36.195,59.627 v1(37.148,60.579) 37.592,61.023 C9.1@38.1,61.023 ; v1(36.195,74.93) CN1.6@36.195,76.375 ; v1(39.021,56.166) 39.307,56.451 C12.1@40.005,56.451 C13.2@41.91,56.451 ; CN1.6@41.042,70.225 42.92,70.225 v1(43.18,70.485) ; CN1.6@41.042,75.225 42.885,75.225 43.18,75.52 v1(43.18,75.565) ; R10.1@45.085,66.103 v1(45.085,67.183) ; CN5.7@48.26,37.084 49.911,37.084 51.435,35.56 CN10.9@53.34,35.56 ; LD1.1@50.28,72.62 53.57,72.62 54.61,73.66 CN11.2@55.88,73.66
  Top Layer w0.508: C18.2@30.48,37.402 C19.1@31.75,37.402 ; U4.0@35.142,38.317 U4.0@34.925,38.1 U4.2@36.225,38.1 36.671,38.1 37.37,38.799 C20.1@38.1,38.799 C21.2@39.37,38.799 ; v2(40.513,66.929) 39.942,66.358 C2.1@39.942,66.04 C5.1@39.942,64.77 39.942,64.061 v1(40.132,63.871) v2(40.64,63.363) U1.2@40.64,62.31
  Bottom Layer w0.203: SB33.2@19.685,30.702 v1(19.685,31.877) ; SB38.2@33.242,22.86 33.274,22.892 v1(33.274,24.13) ; SB53.2@33.877,11.43 v1(34.798,11.43)
  other v1: 6.858,-4.064 11.684,-4.064 16.256,-4.064 22.352,-4.064 30.988,-4.064 35.306,-4.064 2.54,-2.54 27.94,-2.54 -2.794,-2.032 51.308,-2.032 43.942,-1.778 -10.16,0 33.02,0 38.1,0 58.42,0 8.509,0.254 10.795,0.254 16.002,1.016 24.384,1.524 41.91,2.032 45.72,2.032 4.826,2.54 30.48,2.54 35.56,2.54 19.05,3.048 20.574,3.048 46.736,3.302 8.636,3.81 10.668,3.81 15.748,3.81 13.589,3.937 29.718,4.318 39.243,4.445 35.052,4.572 41.148,4.572 -10.16,5.08 37.338,5.08 58.42,5.08 27.94,5.334 24.384,5.588 10.668,6.35 20.32,6.604 4.826,6.731 8.636,6.858 34.798,7.366 4.826,7.874 34.925,8.255 41.656,8.89 50.8,8.89 37.084,9.398 -10.16,10.16 58.42,10.16 42.164,10.414 4.445,11.43 7.366,11.43 38.354,11.684 9.144,12.954 -2.286,13.462 41.783,13.843 6.604,14.224 37.846,14.605 1.778,14.732 -10.16,15.24 9.652,15.24 34.798,15.24 58.42,15.24 -3.302,15.494 7.62,16.002 18.796,16.002 37.846,16.002 39.37,16.51 7.62,19.05 13.716,19.05 5.334,19.558 -10.16,20.32 58.42,20.32 3.048,20.574 18.034,20.574 20.32,20.574 21.59,20.574 25.273,21.844 18.034,22.352 20.32,22.352 25.273,22.86 9.398,24.13 11.43,24.384 -10.16,25.4 58.42,25.4 7.366,26.924 11.43,27.686 13.335,27.94 15.494,27.94 20.828,29.972 7.366,30.226 -10.16,30.48 58.42,30.48 21.844,31.242 7.62,32.766 39.624,35.052 -10.16,35.56 58.42,35.56 8.636,35.941 41.656,36.322 31.75,36.576 20.32,37.084 37.084,37.211 34.671,37.592 35.306,37.592 3.556,38.1 44.196,38.354 34.671,38.608 35.306,38.608 10.16,38.735 37.211,38.862 26.289,39.116 13.081,39.497 38.1,39.497 39.37,39.497 30.353,40.005 33.147,40.132 24.765,40.259 26.797,40.513 -10.16,40.64 10.16,40.64 58.42,40.64 30.353,41.529 33.782,41.529 42.926,41.91 26.289,42.164 23.368,42.799 26.543,44.45 -10.16,45.72 -2.54,45.72 2.54,45.72 58.42,45.72 7.239,45.847 6.604,47.752 43.18,48.26 53.34,48.26 -10.16,50.8 -5.08,50.8 2.54,50.8 43.18,50.8 48.26,50.8 53.34,50.8 58.42,50.8 7.874,51.054 31.496,51.054 35.306,51.054 39.624,51.054 55.372,53.721 23.114,53.848 38.1,53.848 -1.143,53.975 4.572,54.102 8.636,54.102 39.878,54.356 -10.16,55.88 -5.08,55.88 55.88,55.88 31.75,56.134 36.83,56.134 15.748,57.404 -1.016,57.658 16.764,58.42 58.42,58.42 40.64,58.928 13.462,59.436 44.196,59.436 0.762,59.69 40.64,59.944 47.244,59.944 21.336,60.198 23.368,60.706 -10.16,60.96 -5.08,60.96 16.764,61.722 45.212,61.722 14.986,61.976 23.114,63.246 26.416,63.246 46.482,63.5 53.34,63.5 58.42,63.5 42.926,63.754 4.572,65.786 -10.16,66.04 -5.08,66.04 46.99,67.31 4.826,67.564 32.512,67.818 53.34,68.58 58.42,68.58 39.116,70.104 -10.16,71.12 -2.54,71.12 15.367,71.12 29.21,71.374 58.42,73.66 26.416,74.168 -7.62,76.2 -2.54,76.2 2.54,76.2 7.62,76.2 12.7,76.2 17.78,76.2 22.86,76.2 27.94,76.2 45.72,76.2 50.8,76.2 55.88,76.2
  other v2: 15.24,41.91
LED_STLINK: R20.1 R21.1 U2.30 | length 25
  Top Layer w0.127: U2.30@28.38,61.98 29.21,61.98 29.829,62.599 37.072,62.599 37.973,63.5 v1(39.497,63.5) ; v1(48.895,63.5) R20.1@48.895,64.706 R21.1@50.165,64.706
  Bottom Layer w0.127: v1(39.497,63.5) 39.497,64.262 39.917,64.682 47.713,64.682 v1(48.895,63.5)
MCO: SB16.2 SB50.1 | length 55.4
  Top Layer w0.127: v1(28.194,44.831) v1(30.099,44.831)
  Bottom Layer w0.127: SB50.1@20.32,14.192 20.32,16.878 20.18,17.018 20.18,17.615 20.485,17.92 22.207,17.92 22.479,18.192 22.479,21.463 22.733,21.717 22.733,31.75 22.479,32.004 22.479,32.639 22.86,33.02 23.749,33.02 28.194,37.465 v1(28.194,44.831) ; v1(30.099,44.831) 30.099,45.212 29.858,45.453 29.858,55.893 30.734,56.769 34.417,56.769 34.925,57.277 SB16.2@34.925,58.198
NetB1_2: B1.2 B1.3 C15.2 R30.1 SB17.2 | length 18
  Top Layer w0.127: v1(9.017,45.974) 11.311,45.974 B1.3@11.347,46.01 ; B1.3@11.375,46.038 B1.3@11.347,46.01 ; B1.2@20.375,46.038 B1.2@20.347,46.01 ; R30.1@23.431,45.085 23.431,46.038 ; C15.2@23.431,46.99 23.431,46.038 ; B1.3@11.347,46.01 B1.2@20.347,46.01 ; B1.2@20.347,46.01 23.404,46.01 23.431,46.038
  Bottom Layer w0.127: v1(9.017,45.974) 9.017,44.545 SB17.2@9.112,44.45
NetC2_2: C2.2 C5.2 D2.2 D3.2 U1.1 U1.3 | length 13.6
  Top Layer w0.508: U1.3@39.69,62.31 39.69,61.529 39.939,61.28 41.59,61.28 ; D2.2@41.783,67.31 41.783,66.929 41.339,66.484 C2.2@41.339,66.04 C5.2@41.339,64.77 41.339,64.008 41.59,63.756 U1.1@41.59,62.31 41.59,61.28 ; 43.815,57.658 43.815,58.42 42.545,59.69 42.545,60.325 41.59,61.28
NetC9_2: C9.2 U1.4 | length 1.6
  Top Layer w0.127: C9.2@38.1,59.627 U1.4@39.673,59.627
NetC10_1: C10.1 R25.2 SB16.1 | length 3.5
  Top Layer w0.127: R25.2@33.719,60.96 v1(34.925,60.96) C10.1@36.132,60.96
  Bottom Layer w0.127: SB16.1@34.925,59.912 v1(34.925,60.96)
NetC15_1: C15.1 R29.2 | length 1.9
  Top Layer w0.127: C15.1@24.828,46.99 R29.2@24.828,48.895
NetC17_1: C17.1 D4.1 U3.2 U3.4 | length 24.7
  Top Layer w0.508: D4.1@12.192,42.545 12.192,41.529 13.081,40.64 U3.2@15.24,40.64 U3.4@21.59,40.64 ; 20.066,38.735 21.59,40.259 U3.4@21.59,40.64 ; 20.066,42.545 21.59,41.021 U3.4@21.59,40.64 ; 22.606,38.481 22.606,39.624 U3.4@21.59,40.64 ; 22.606,42.799 22.606,41.656 U3.4@21.59,40.64 ; C17.1@24.765,41.91 23.495,40.64 U3.4@21.59,40.64
NetC18_1: C18.1 C19.2 SB2.1 U4.4 | length 4.8
  Top Layer w0.508: SB2.1@29.071,38.723 SB2.1@29.23,38.882 ; SB2.1@29.21,38.957 30.321,38.957 C18.1@30.48,38.799 C19.2@31.75,38.799 32.787,38.799 33.039,39.05 U4.4@33.625,39.05
NetC22_1: C22.1 SB32.1 SB33.1 U5.47 | length 8.3
  Top Layer w0.127: C22.1@17.907,29.75 17.907,28.829 18.343,28.393 v1(18.343,27.94) U5.47@18.343,24.952
  Bottom Layer w0.127: SB32.1@18.415,28.988 18.343,28.916 v1(18.343,27.94) 19.431,27.94 19.685,28.194 SB33.1@19.685,28.988
NetC25_1: C25.1 SB38.1 U5.31 | length 6.1
  Top Layer w0.127: U5.31@27.491,22.297 29.79,22.297 v1(30.353,22.86) 30.353,23.114 30.734,23.495 C25.1@31.75,23.495
  Bottom Layer w0.127: v1(30.353,22.86) SB38.1@31.528,22.86
NetC31_1: C31.1 R34.1 X2.1 | length 9.4
  Top Layer w0.127: X2.1@12.275,5.41 X2.1@12.326,5.461 ; C31.1@12.636,8.255 12.636,5.771 X2.1@12.326,5.461 ; R34.1@17.145,8.191 17.145,7.493 16.764,7.112 14.986,7.112 13.335,5.461 X2.1@12.326,5.461
NetC32_1: C32.1 R36.1 X2.4 | length 12.7
  Top Layer w0.127: C32.1@12.636,0.254 12.636,1.849 X2.4@12.275,2.21 13.64,2.21 14.224,2.794 14.224,5.588 15.367,6.731 17.526,6.731 18.415,7.62 R36.1@18.415,8.191
NetC33_1: C33.1 R35.2 X3.2 | length 9.2
  Top Layer w0.127: C33.1@17.716,1.27 17.716,2.476 17.145,3.048 17.145,4.445 18.796,4.445 19.685,5.334 R35.2@19.685,8.191
NetC34_1: C34.1 R37.2 X3.1 | length 7.7
  Top Layer w0.127: R37.2@20.955,8.191 20.955,7.112 22.225,5.842 22.225,3.048 21.717,2.54 21.717,1.333 C34.1@21.653,1.27
NetCN1_2: CN1.2 R18.1 | length 4.4
  Top Layer w0.127: CN1.2@36.992,70.275 36.992,67.783 37.465,67.31 R18.1@37.465,66.103
NetCN1_3: CN1.3 R16.1 R17.1 | length 5.4
  Top Layer w0.127: R16.1@34.928,66.106 36.192,66.106 CN1.3@36.192,70.275
NetCN1_4: CN1.4 R15.1 | length 6
  Top Layer w0.127: R15.1@33.02,66.103 33.02,67.056 33.401,67.437 34.798,67.437 35.392,68.031 CN1.4@35.392,70.275
NetCN2_1: CN2.1 SB3.2 SB4.1 | length 4.6
  Bottom Layer w0.127: SB3.2@9.112,74.93 SB4.1@13.748,74.93
NetCN2_2: CN2.2 SB5.2 SB6.1 | length 4.6
  Bottom Layer w0.127: SB5.2@9.112,72.39 SB6.1@13.748,72.39
NetCN2_3: CN2.3 SB7.2 SB8.1 | length 4.6
  Bottom Layer w0.127: SB7.2@9.112,69.85 SB8.1@13.748,69.85
NetCN2_4: CN2.4 SB9.2 SB10.1 | length 4.6
  Bottom Layer w0.127: SB9.2@9.112,67.31 SB10.1@13.748,67.31
NetCN4_1: CN4.1 D1.1 R1.1 | length 5.3
  Top Layer w0.127: CN4.1@-2.54,68.58 D1.1@0.635,68.58 ; D1.1@0.762,68.58 0.762,69.215 1.206,69.659 R1.1@1.206,70.485
NetCN4_2: CN4.2 R5.1 | length 4
  Top Layer w0.127: CN4.2@-2.54,66.04 -1.27,66.04 -0.635,66.675 R5.1@1.206,66.675
NetCN4_4: CN4.4 R8.1 | length 7
  Top Layer w0.127: CN4.4@-2.54,60.96 -1.397,60.96 -1.016,61.341 -1.016,64.135 -0.381,64.77 R8.1@1.206,64.77
NetCN4_5: CN4.5 R13.1 | length 7.7
  Top Layer w0.127: CN4.5@-2.54,58.42 -1.016,58.42 -0.635,58.801 -0.635,62.484 -0.254,62.865 R13.1@1.206,62.865
NetCN4_6: CN4.6 R22.1 | length 8.2
  Top Layer w0.127: CN4.6@-2.54,55.88 -0.762,55.88 -0.254,56.388 -0.254,60.325 0.381,60.96 R22.1@1.206,60.96
NetCN5_4: CN5.4 CN10.15 SB20.1 SB40.2 | length 30.8
  Top Layer w0.127: v1(38.735,22.835) 42.52,22.835 v1(42.545,22.86) ; v1(41.275,29.972) 41.783,29.972 42.037,29.718 43.942,29.718 44.463,30.239 46.596,30.239 47.371,29.464 CN5.4@48.26,29.464 49.911,29.464 51.435,27.94 CN10.15@53.34,27.94
  Bottom Layer w0.127: SB40.2@37.687,22.225 38.735,22.225 v1(38.735,22.835) ; SB20.1@37.687,31.75 39.497,31.75 v1(41.275,29.972) 42.291,28.956 42.291,24.13 42.545,23.876 v1(42.545,22.86)
NetCN5_5: CN5.5 CN10.13 SB24.1 SB41.2 | length 33.5
  Top Layer w0.127: v1(38.735,20.193) 40.614,20.193 40.868,20.447 v1(41.275,20.447) ; v1(41.275,26.035) v1(44.831,26.035) ; CN5.5@48.26,32.004 49.911,32.004 51.435,30.48 CN10.13@53.34,30.48
  Bottom Layer w0.127: SB41.2@37.687,19.685 38.481,19.685 38.735,19.939 v1(38.735,20.193) ; SB24.1@37.687,29.21 39.37,29.21 41.275,27.305 v1(41.275,26.035) v1(41.275,20.447) ; v1(44.831,26.035) 44.831,26.852 44.323,27.36 44.323,29.972 46.355,32.004 CN5.5@48.26,32.004
NetCN5_6: CN5.6 CN10.11 SB21.2 SB29.1 SB42.2 | length 42.4
  Top Layer w0.127: v1(38.735,17.78) v1(40.005,17.78) ; v1(38.735,26.67) v1(42.926,26.67) ; v1(39.243,32.766) 42.926,32.766 44.704,34.544 CN5.6@48.26,34.544 49.911,34.544 51.435,33.02 CN10.11@53.34,33.02
  Bottom Layer w0.127: SB42.2@37.687,18.415 38.1,18.415 v1(38.735,17.78) ; SB29.1@37.687,26.67 v1(38.735,26.67) 39.37,26.67 40.005,26.035 v1(40.005,17.78) ; SB21.2@37.687,33.02 38.989,33.02 v1(39.243,32.766) 42.672,29.337 42.672,27.305 42.926,27.051 v1(42.926,26.67)
NetCN7_25: CN7.25 SB49.1 | length 22.2
  Bottom Layer w0.127: CN7.25@-7.62,15.24 -7.62,14.224 -7.302,13.906 -3.746,13.906 -1.524,11.684 1.174,11.684 2.584,10.274 8.75,10.274 10.541,12.065 SB49.1@11.208,12.065
NetCN7_27: CN7.27 SB48.1 | length 21
  Bottom Layer w0.127: CN7.27@-7.62,12.7 -7.62,11.684 -7.112,11.176 1.143,11.176 2.426,9.893 9.258,9.893 10.16,10.795 SB48.1@11.208,10.795
NetCN7_29: CN7.29 SB55.1 | length 19.8
  Bottom Layer w0.127: CN7.29@-7.62,10.16 -7.62,9.398 -7.366,9.144 9.779,9.144 10.033,8.89 SB55.1@11.208,8.89
NetCN7_31: CN7.31 SB54.1 | length 20.1
  Bottom Layer w0.127: CN7.31@-7.62,7.62 -7.62,8.382 -7.366,8.636 9.586,8.636 10.602,7.62 SB54.1@11.208,7.62